# Altium PCB Remote_Controller.PcbDoc
Units mil, origin at the board's own origin, x right, y up, seen from the top; angles counter-clockwise.
Board outline 2680 x 2000 mil, 2 copper layers (Top Layer, Bottom Layer); 9 components, 11 nets, 131 pads, 0 vias.
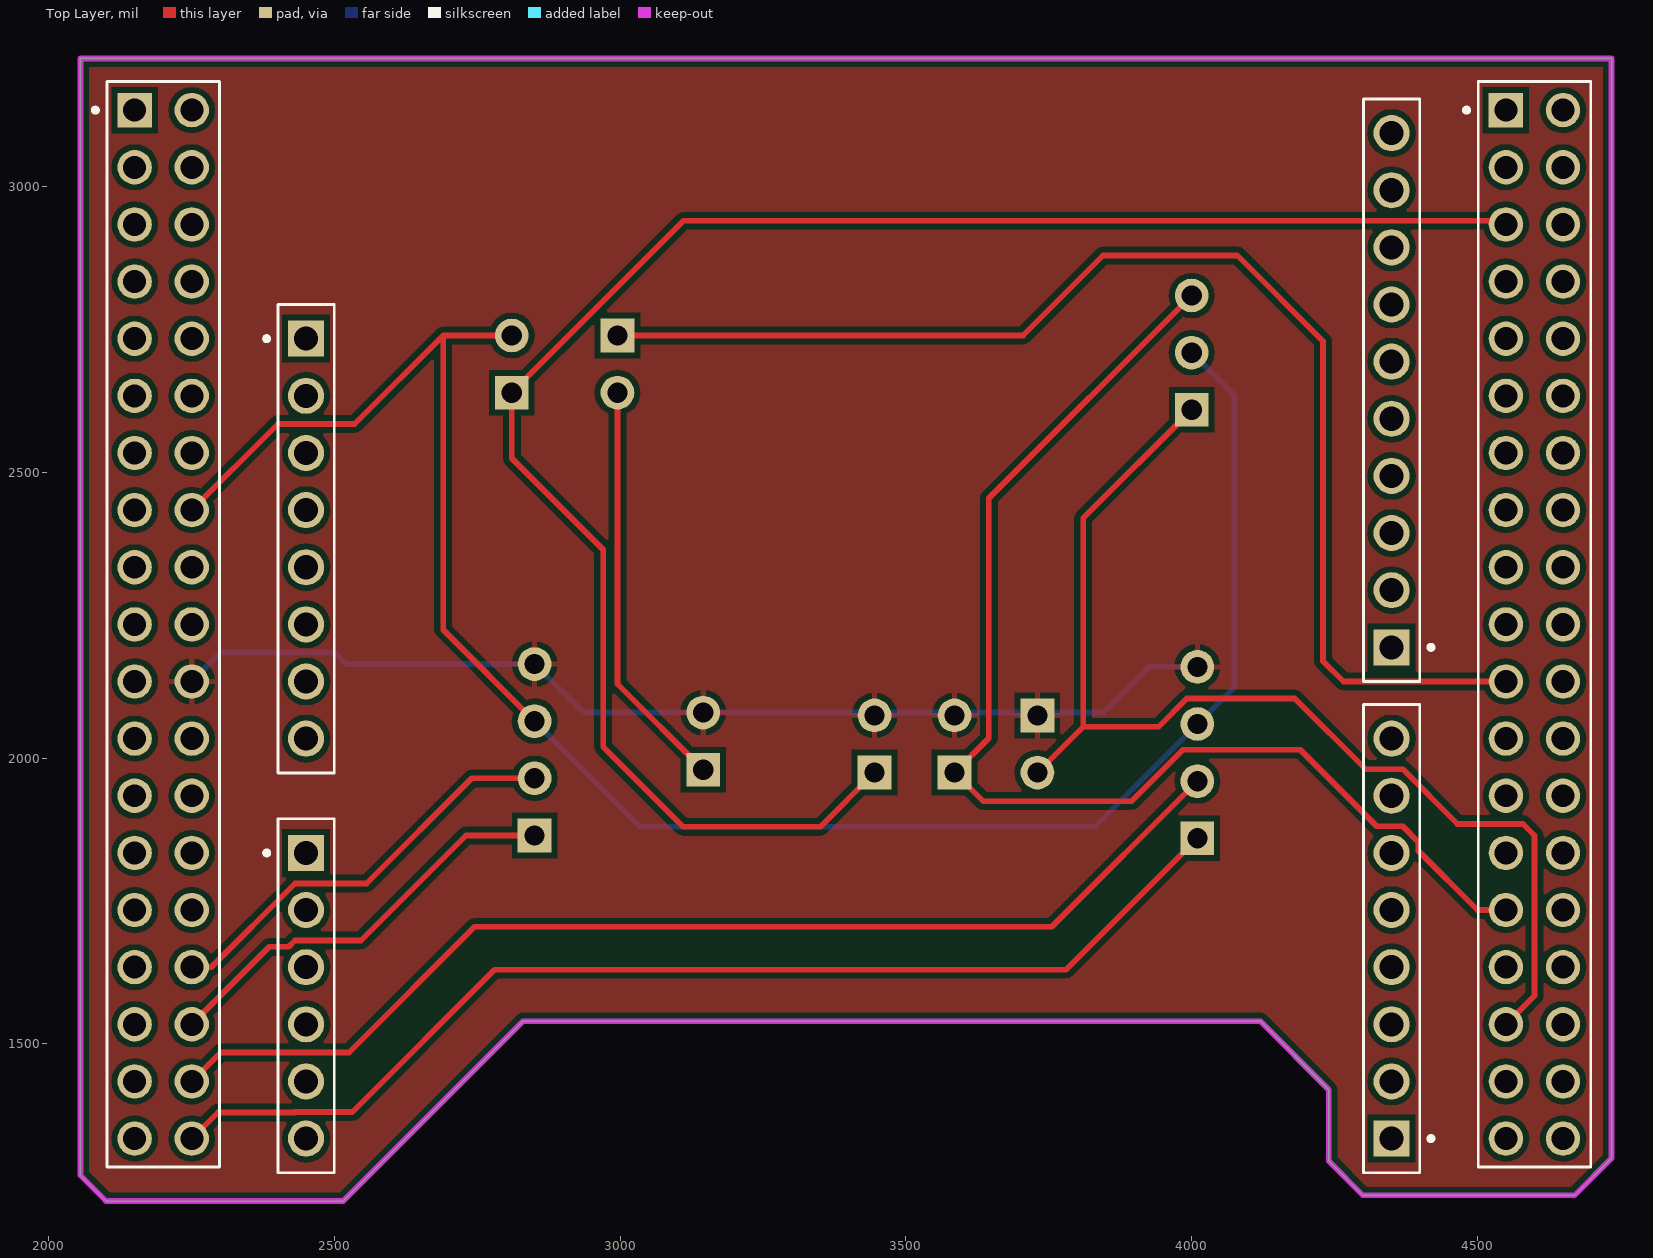
[diagram p0: Top Layer view]
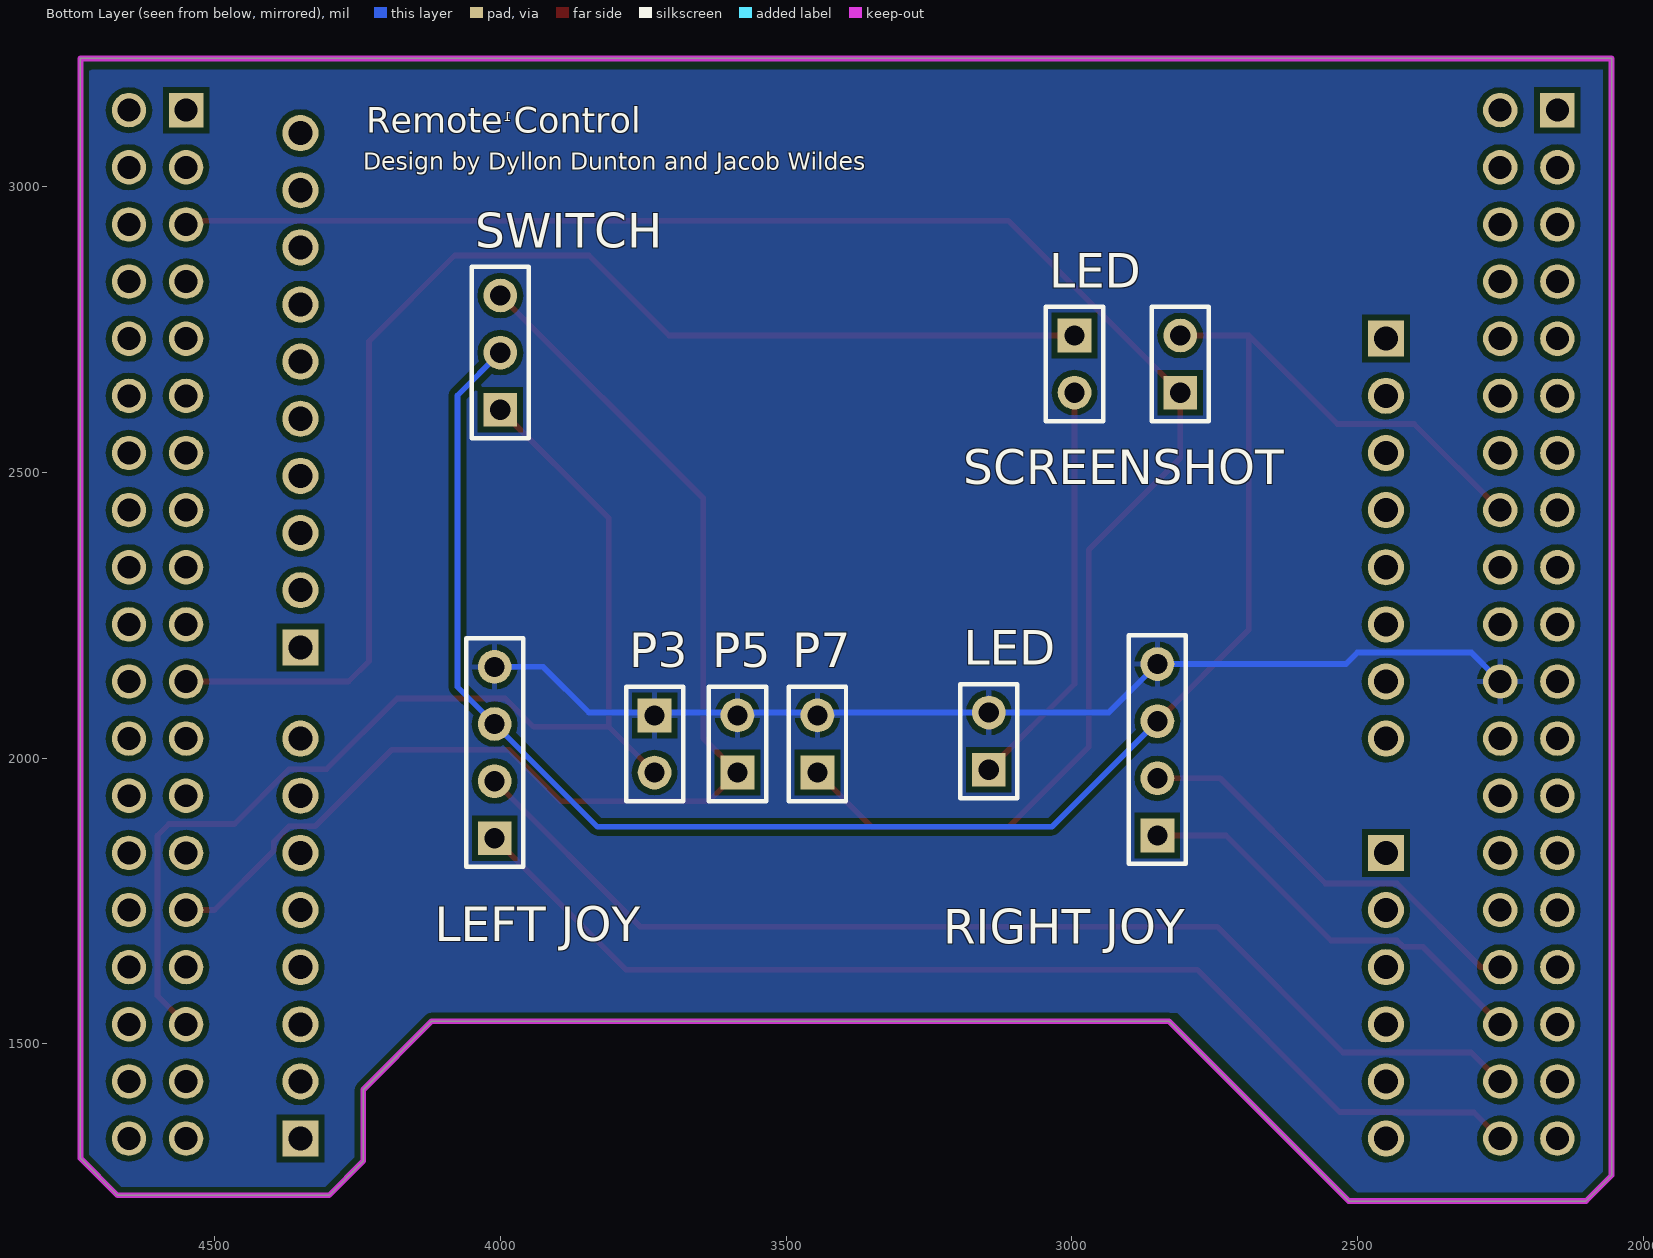
[diagram p1: Bottom Layer view, seen from below]

## Layer stack, top to bottom
Top Solder: solder mask 0.4, Solder Resist, Dk 3.5
Top Layer: signal copper 1.4
Dielectric 1: dielectric 12.6, FR-4, Dk 4.8
Bottom Layer: signal copper 1.4
Bottom Solder: solder mask 0.4, Solder Resist, Dk 3.5

## Board outline
2055,1270 2100,1225 2515,1225 2830,1540 4120,1540 4240,1420 4240,1295 4300,1235 4670,1235 4735,1300 4735,3225 2055,3225

## Design rules (kind name [scope] priority, off if disabled: settings)
Clearance [All] p1: gap=10
PolygonConnect [All] p1: connectstyle=Relief reliefconductorwidth=10 reliefentries=4 polygonreliefangle="90 Angle" airgapwidth=10
RoutingVias [All] p1: holewidth=28 width=50 viastyle="Through Hole" minholewidth=28 minwidth=50 maxholewidth=28 maxwidth=50
SolderMaskExpansion [All] p1: expansion=4
Width [All] p1: maxlimit=10 minlimit=10 preferedwidth=10
30 further rules are at their usual default settings.

## Components (designator, comment, footprint, x,y, rotation, side; value= is the part's Value field where it differs from the comment)
LED "Current Limiter" HDR1X2 3145,1980 r90 bottom (schematic designator P9)
LED "PWR LED" HDR1X2 2995,2740 r270 bottom (schematic designator P8)
"LEFT JOY" "Left Joystick" HDR1X4 4010,1860 r90 bottom (schematic designator P1)
P3 "PullDown" HDR1X2 3730,2075 r270 bottom
P5 "PullDown" HDR1X2 3585,1975 r90 bottom
P7 "PullDown" HDR1X2 3445,1975 r90 bottom
"RIGHT JOY" "Right Joystick" HDR1X4 2850,1865 r90 bottom (schematic designator P2)
SCREENSHOT "Screenshot" HDR1X2 2810,2640 r90 bottom (schematic designator P6)
SWITCH "Switch" HDR1X3 4000,2610 r90 bottom (schematic designator P4)

## Footprints (in the part's own frame and the unit in brackets; to place one, negate y for a bottom-side part, rotate by r counter-clockwise, add the part's x,y. Pads: shape width x height; smd on the part's side, far side on the other; paste and mask are expansions set on the pad)
HDR1X2 [mm] "Connector; Header; 2 Position"
  rect 1.5x1.5 hole 0.9: 1(0,0)
  round 1.5 hole 0.9: 2(2.54,0)
  silkscreen extent -1.27,-1.27 3.81,1.27
HDR1X3 [mm] "Connector; Header; 3 Position"
  rect 1.5x1.5 hole 0.9: 1(0,0)
  round 1.5 hole 0.9: 2(2.54,0) 3(5.08,0)
  silkscreen extent -1.27,-1.27 6.35,1.27
HDR1X4 [mm] "Connector; Header; 4 Position"
  rect 1.5x1.5 hole 0.9: 1(0,0)
  round 1.5 hole 0.9: 2(2.54,0) 3(5.08,0) 4(7.62,0)
  silkscreen extent -1.27,-1.27 8.89,1.27

## Part data
LED LED P3 P5 P7 SCREENSHOT: library part "Header 2", "Header, 2-Pin"
"LEFT JOY" "RIGHT JOY": library part "Header 4", "Header, 4-Pin"
SWITCH: library part "Header 3", "Header, 3-Pin"

## Free pads (board coordinates)
  rect 63.19x63.19 hole 42.13: CN5_1(4350,2194.25) CN6_1(2450,2734.41) CN8_1(2450,1834.41) CN9_1(4350,1334.41)
  round 63.19 hole 42.13: CN5_2(4350,2294.25) CN5_3(4350,2394.25) CN5_4(4350,2494.25) CN5_5(4350,2594.25) CN5_6(4350,2694.25) CN5_7(4350,2794.25) CN5_8(4350,2894.25) CN5_9(4350,2994.25) CN5_10(4350,3094.25) CN6_2(2450,2634.41) CN6_3(2450,2534.41) CN6_4(2450,2434.41) CN6_5(2450,2334.41) CN6_6(2450,2234.41) CN6_7(2450,2134.41) CN6_8(2450,2034.41) CN8_2(2450,1734.41) CN8_3(2450,1634.41) CN8_4(2450,1534.41) CN8_5(2450,1434.41) CN8_6(2450,1334.41) CN9_2(4350,1434.41) CN9_3(4350,1534.41) CN9_4(4350,1634.41) CN9_5(4350,1734.41) CN9_6(4350,1834.41) CN9_7(4350,1934.41) CN9_8(4350,2034.41)
  rect 60.24x60.24 hole 40.16: CN7_1(2150,3134.41) CN10_1(4550,3134.41)
  round 60.24 hole 40.16: CN7_2(2250,3134.41) CN7_3(2150,3034.41) CN7_4(2250,3034.41) CN7_5(2150,2934.41) CN7_6(2250,2934.41) CN7_7(2150,2834.41) CN7_8(2250,2834.41) CN7_9(2150,2734.41) CN7_10(2250,2734.41) CN7_11(2150,2634.41) CN7_12(2250,2634.41) CN7_13(2150,2534.41) CN7_14(2250,2534.41) CN7_15(2150,2434.41) CN7_16(2250,2434.41) CN7_17(2150,2334.41) CN7_18(2250,2334.41) CN7_19(2150,2234.41) CN7_20(2250,2234.41) CN7_21(2150,2134.41) CN7_22(2250,2134.41) CN7_23(2150,2034.41) CN7_24(2250,2034.41) CN7_25(2150,1934.41) CN7_26(2250,1934.41) CN7_27(2150,1834.41) CN7_28(2250,1834.41) CN7_29(2150,1734.41) CN7_30(2250,1734.41) CN7_31(2150,1634.41) CN7_32(2250,1634.41) CN7_33(2150,1534.41) CN7_34(2250,1534.41) CN7_35(2150,1434.41) CN7_36(2250,1434.41) CN7_37(2150,1334.41) CN7_38(2250,1334.41) CN10_2(4650,3134.41) CN10_3(4550,3034.41) CN10_4(4650,3034.41) CN10_5(4550,2934.41) CN10_6(4650,2934.41) CN10_7(4550,2834.41) CN10_8(4650,2834.41) CN10_9(4550,2734.41) CN10_10(4650,2734.41) CN10_11(4550,2634.41) CN10_12(4650,2634.41) CN10_13(4550,2534.41) CN10_14(4650,2534.41) CN10_15(4550,2434.41) CN10_16(4650,2434.41) CN10_17(4550,2334.41) CN10_18(4650,2334.41) CN10_19(4550,2234.41) CN10_20(4650,2234.41) CN10_21(4550,2134.41) CN10_22(4650,2134.41) CN10_23(4550,2034.41) CN10_24(4650,2034.41) CN10_25(4550,1934.41) CN10_26(4650,1934.41) CN10_27(4550,1834.41) CN10_28(4650,1834.41) CN10_29(4550,1734.41) CN10_30(4650,1734.41) CN10_31(4550,1634.41) CN10_32(4650,1634.41) CN10_33(4550,1534.41) CN10_34(4650,1534.41) CN10_35(4550,1434.41) CN10_36(4650,1434.41) CN10_37(4550,1334.41) CN10_38(4650,1334.41)

## Nets (pads, with @x,y where several pads share a name; then routed paths per layer and width w, separated by ;. In a path a pad name is that pad's centre, name@x,y a point inside that pad or via, vN(x,y) a via of type N, cw(c..) or ccw(c..) an arc to the next point about the centre after c; other vN are vias at no path point)
3V3: "LEFT JOY.3" "RIGHT JOY.3" pad.CN7_16 SCREENSHOT.2 SWITCH.2 | length 3447
  Top Layer w10: pad.CN7_16 2400.59,2585 2535,2585 2690,2740 ; SCREENSHOT.2 2690,2740 ; 2850,2065 2690,2225 2690,2740
  Bottom Layer w10: 2850,2065 3035,1880 3830,1880 4010,2060 4075,2125 4075,2635 SWITCH.2
ASC: P3.2 pad.CN10_33 SWITCH.1 | length 2007.9
  Top Layer w10: P3.2 3810,2055 ; SWITCH.1 3810,2420 3810,2055 ; pad.CN10_33 4600,1584.41 4600,1865 4580,1885 4465.3,1885 4369.3,1981 4304,1981 4180.47,2104.53 3991.56,2104.53 3942.03,2055 3810,2055
DESC: P5.1 pad.CN10_29 SWITCH.3 | length 2155.2
  Top Layer w10: SWITCH.3 3645,2455 3645,2035 P5.1 3635,1925 3895,1925 3985,2015 4190,2015 4324,1881 4369.3,1881 4396.59,1853.71 4396.59,1838.15 4500.34,1734.41 pad.CN10_29
GND: "LEFT JOY.4" "RIGHT JOY.4" LED.2@3145,2080 P3.1 P5.2 P7.2 pad.CN7_22 | length 1857.6
  Bottom Layer w10: pad.CN7_22 2300.59,2185 2500,2185 2520,2165 2850,2165 2935,2080 3130,2080 3470,2080 3610,2080 3745,2080 3845,2080 3925,2160 4010,2160
LED: LED.1@2995,2740 pad.CN10_21 | length 2249.9
  Top Layer w10: LED.1@2995,2740 3705,2740 3845,2880 4080,2880 4230,2730 4230,2170 4265.59,2134.41 pad.CN10_21
LJ_LR: "LEFT JOY.2" pad.CN7_36 | length 1977.7
  Top Layer w10: pad.CN7_36 2300.59,1485 2525,1485 2745,1705 3755,1705 4010,1960
LJ_UD: "LEFT JOY.1" pad.CN7_38 | length 1977.7
  Top Layer w10: pad.CN7_38 2295.59,1380 2429.7,1380 2430.7,1381 2531,1381 2780,1630 3780,1630 4010,1860
NetP8_2: LED.1@3145,1980 LED.2@2995,2640 | length 722.1
  Top Layer w10: LED.2@2995,2640 2995,2130 LED.1@3145,1980
RJ_LR: "RIGHT JOY.2" pad.CN7_32 | length 736.9
  Top Layer w10: pad.CN7_32 2284.11,1634.41 2430.7,1781 2556,1781 2740,1965 2850,1965
RJ_UD: "RIGHT JOY.1" pad.CN7_34 | length 736.9
  Top Layer w10: pad.CN7_34 2385.59,1670 2419.7,1670 2430.7,1681 2546,1681 2730,1865 2850,1865
SCREENSHOT: P7.1 pad.CN10_5 SCREENSHOT.1 | length 3116.8
  Top Layer w10: P7.1 3350,1880 3110,1880 2970,2020 2970,2365 2810,2525 SCREENSHOT.1 3110.85,2940.85 pad.CN10_5@4543.56,2940.85

## Polygon pours and split planes (outlines as drawn)
GND on Top Layer "Top Layer-Ground" (solid, remove dead copper, pour order 2): 2055,3225 4735,3225 4735,1300 4670,1235 4300,1235 4250,1285 4250,1295 4250,1425 4245,1430 4130,1545 4130,1550 2830,1550 2820,1540 2515,1235 2515,1225 2110,1225 2065,1270 2055,1270
GND on Bottom Layer "Bottom Layer-Ground" (solid, remove dead copper, pour order 4): 2070,3205 4715,3205 4720,3210 4720,1305 4660,1245 4310,1245 4305,1245 4250,1300 4250,1425 4250,1430 4125,1555 2825,1555 2815,1555 2505,1245 2495,1235 2105,1235 2065,1275

## Keep-outs
Keep-Out Layer:
  the board outline again, w10

## Silkscreen, mask and mechanical layers (free items; w line width, h text height)
Top Overlay:
  circle w7.87: c2381.1,2734.41 r3.94
  circle w7.87: c4418.9,1334.41 r3.94
  circle w7.87: c2381.1,1834.41 r3.94
  circle w7.87: c4418.9,2194.25 r3.94
  circle w7.87: c2081.1,3134.41 r3.94
  circle w7.87: c4481.1,3134.41 r3.94
  lines w5: 2101.57,1284.41 2101.57,3184.41 2298.43,3184.41 2298.43,1284.41 2101.57,1284.41 ; 2400.79,1274.57 2400.79,1894.25 2499.21,1894.25 2499.21,1274.57 2400.79,1274.57 ; 2400.79,1974.57 2400.79,2794.25 2499.21,2794.25 2499.21,1974.57 2400.79,1974.57 ; 4300.79,1274.57 4300.79,2094.25 4399.21,2094.25 4399.21,1274.57 4300.79,1274.57 ; 4300.79,2134.41 4300.79,3154.09 4399.21,3154.09 4399.21,2134.41 4300.79,2134.41 ; 4501.57,1284.41 4501.57,3184.41 4698.43,3184.41 4698.43,1284.41 4501.57,1284.41
Bottom Overlay:
  text "1" at 3980,3115 h16
  text "Remote Control" at 4235,3095 h45
  text "Design by Dyllon Dunton and Jacob Wildes" at 4240,3030 h30
Mechanical 13:
  circle w7.87: c2381.1,2734.41 r3.94
  circle w7.87: c4418.9,1334.41 r3.94
  circle w7.87: c2381.1,1834.41 r3.94
  circle w7.87: c4418.9,2194.25 r3.94
  circle w7.87: c2081.1,3134.41 r3.94
  circle w7.87: c4481.1,3134.41 r3.94
  lines w5: 2101.57,1284.41 2101.57,3184.41 2298.43,3184.41 2298.43,1284.41 2101.57,1284.41 ; 2400.79,1274.57 2400.79,1894.25 2499.21,1894.25 2499.21,1274.57 2400.79,1274.57 ; 2400.79,1974.57 2400.79,2794.25 2499.21,2794.25 2499.21,1974.57 2400.79,1974.57 ; 4300.79,1274.57 4300.79,2094.25 4399.21,2094.25 4399.21,1274.57 4300.79,1274.57 ; 4300.79,2134.41 4300.79,3154.09 4399.21,3154.09 4399.21,2134.41 4300.79,2134.41 ; 4501.57,1284.41 4501.57,3184.41 4698.43,3184.41 4698.43,1284.41 4501.57,1284.41